# Altium PCB 控制板图.PcbDoc
Units mm, origin at the board's own origin, x right, y up, seen from the top; angles counter-clockwise.
Board outline 92.64 x 57.49 mm, 2 copper layers (Top Layer, Bottom Layer); 70 components, 69 nets, 280 pads, 119 vias.
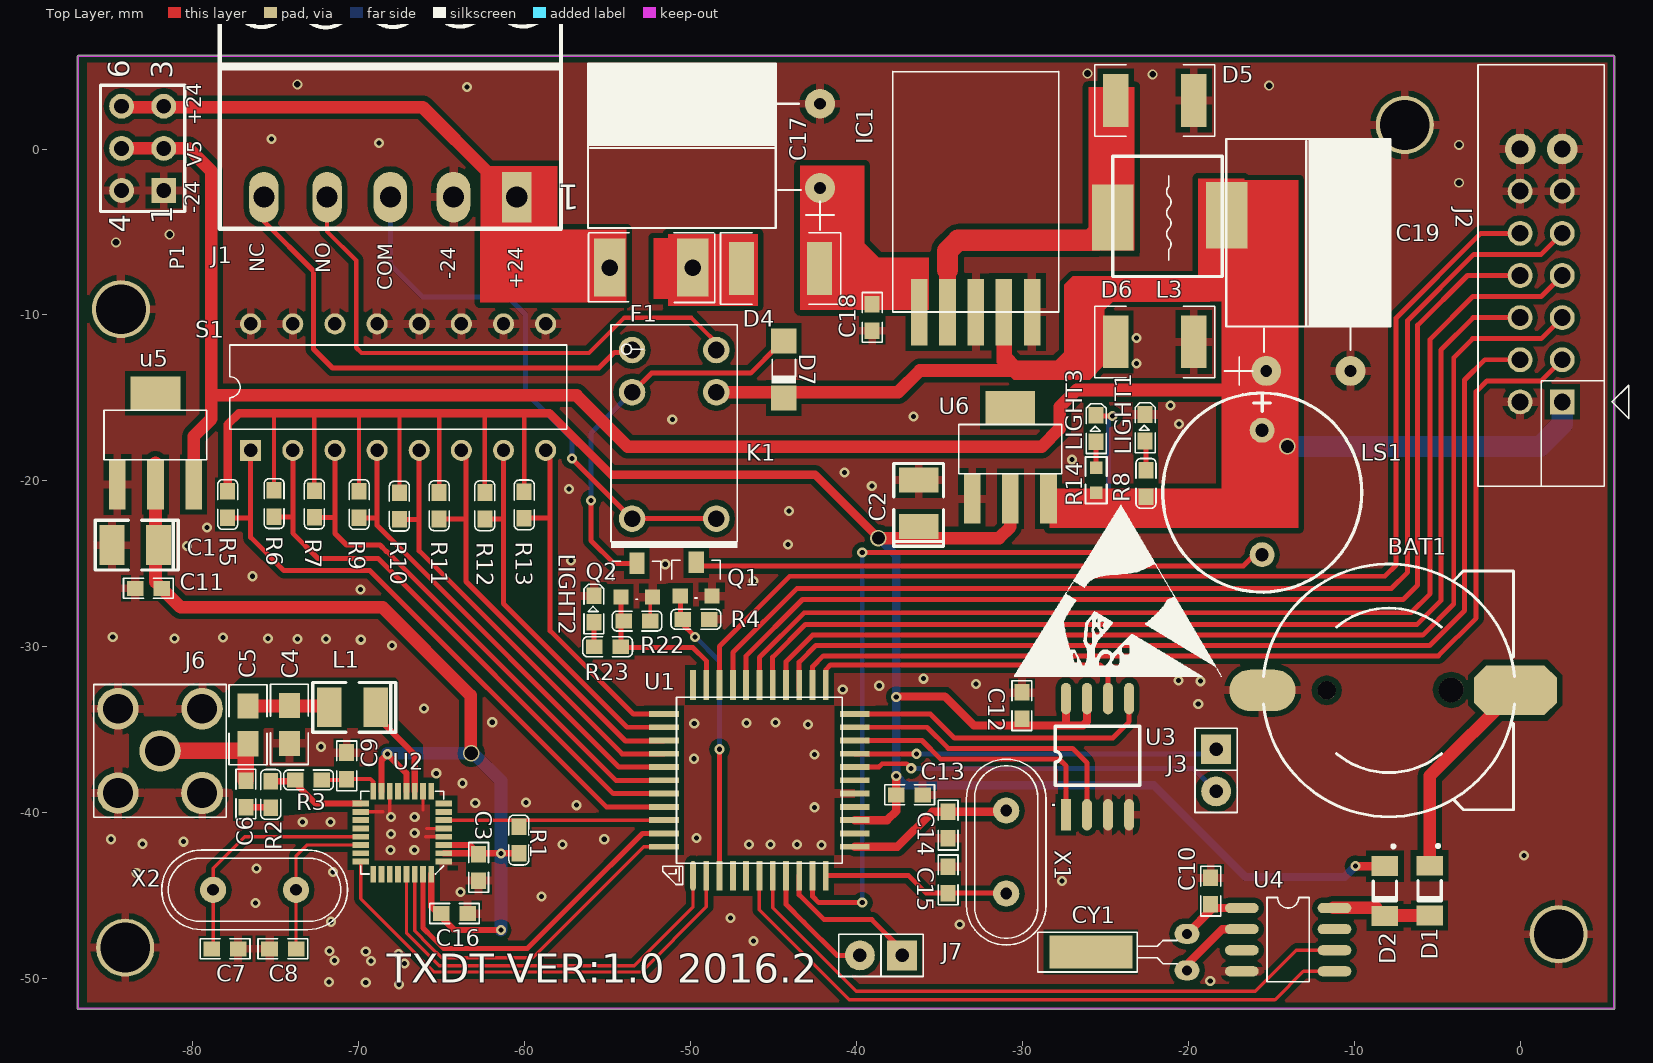
[diagram p0: Top Layer view]
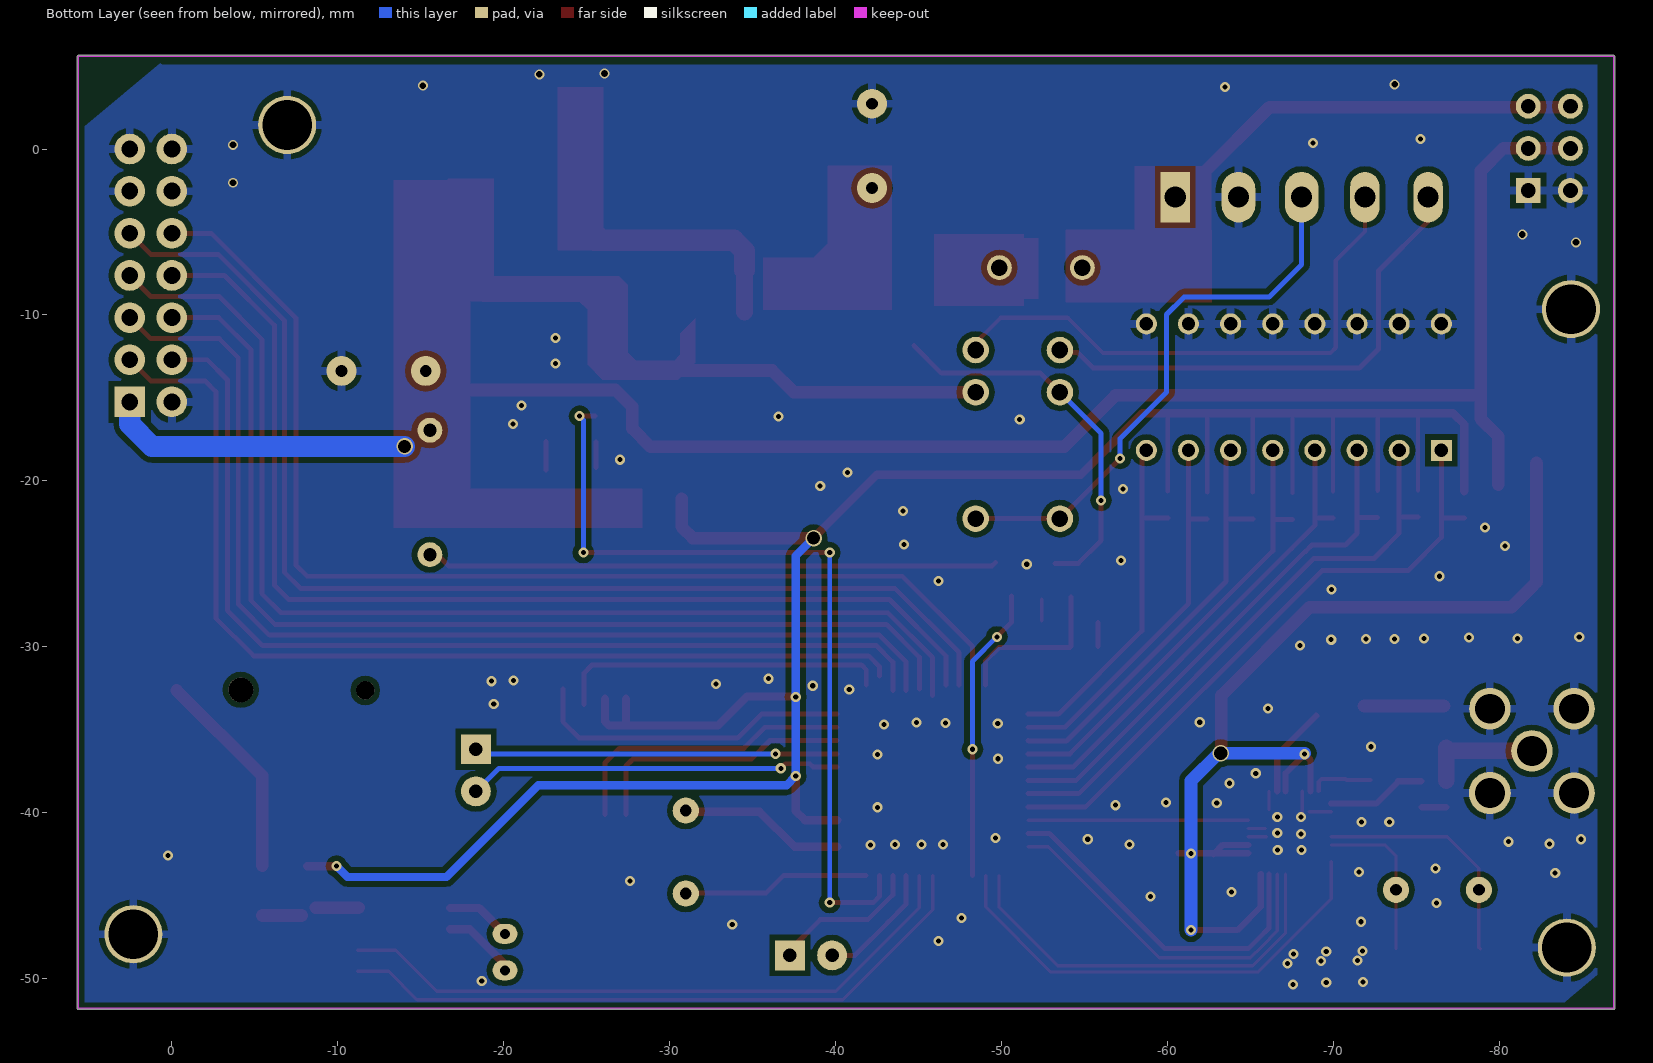
[diagram p1: Bottom Layer view, seen from below]

## Layer stack, top to bottom
Top Layer: signal copper 0.0356
Dielectric: dielectric 0.32, FR-4, Dk 4.8
Bottom Layer: signal copper 0.0356

## Board outline
-86.9,-51.85 cw(c-86.9,-51.8) -86.95,-51.8 -86.95,5.588 cw(c-86.9,5.588) -86.9,5.638 5.64,5.638 cw(c5.64,5.588) 5.69,5.588 5.69,-51.8 cw(c5.64,-51.8) 5.64,-51.85

## Design rules (kind name [scope] priority, off if disabled: settings)
Clearance [All] p1: gap=0.076
FabricationTestpoint [(IsPad And (OnTopLayer Or OnBottomLayer))] p1: side=3 testpointundercomponent=TRUE minsize=1.016 maxsize=2.54 preferedsize=1.524 minholesize=0 maxholesize=1.016 preferedholesize=0.813 testpointgrid=0.025 allowsidetop=TRUE allowsidebottom=TRUE usegrid=TRUE gridtolerance=0
PlaneConnect [All] p1: planeconnectstyle=Relief reliefexpansion=0.508 reliefentries=4 reliefconductorwidth=0.5 reliefairgap=0.254
PolygonConnect PolygonConnect_1 [isvia] p1: connectstyle=Direct reliefconductorwidth=0.254 reliefentries=4 polygonreliefangle="90 Angle"
PolygonConnect [All] p2: connectstyle=Relief reliefconductorwidth=0.5 reliefentries=4 polygonreliefangle="90 Angle"
RoutingVias [All] p1: holewidth=0.711 width=1.27 viastyle="Through Hole" minholewidth=0.711 minwidth=1.27 maxholewidth=0.711 maxwidth=1.27
SilkscreenOverComponentPads [All] p1: minsilkscreentomaskgap=0.254
SolderMaskExpansion [All] p1: expansion=0.102
Width [All] p1: maxlimit=2 minlimit=0.1 preferedwidth=0.254 minimp=50.000000 maximp=50.000000 favimp=50.000000
25 further rules are at their usual default settings.

## Components (designator, comment, footprint, x,y, rotation, side; value= is the part's Value field where it differs from the comment)
BAT1 "BATTERY" BAT600 -0.275,-32.625 r270 top
C1 "100uF" SMB -83.475,-23.875 r180 top
C2 "100uF" SMB -36.25,-21.35 r90 top
C3 "104" 0603_C -62.775,-42.5 r270 top
C4 "47P" 0805 -74.175,-35.825 r90 top
C5 "15P" 0805 -76.675,-35.85 r90 top
C6 "104" 0603_C -76.8,-39.675 r90 top
C7 "15P" 0603_C -78.855,-48.206 r0 top
C8 "15P" 0603_C -73.775,-48.206 r180 top
C9 "104" 0603_C -70.725,-37.975 r90 top
C10 "4.7P" 0603_C -18.65,-45.525 r90 top
C11 "104" 0603_C -81.875,-26.475 r180 top
C12 "104" 0603_C -30.025,-34.35 r90 top
C13 "104" 0603_C -37.6,-38.925 r0 top
C14 "18P" 0603_C -34.475,-39.95 r270 top
C15 "18P" 0603_C -34.475,-44.85 r90 top
C16 "104" 0603_C -65.025,-46.075 r0 top
C17 "470uF" CAP_RB.2/.52 -42.2,-2.35 r270 top
C18 "1uF" 0603_C -39.05,-9.35 r270 top
C19 "1000uF" CAP_RB.2/.52 -15.3,-13.375 r180 top
CY1 "32.768K" XTAL_26B -20.075,-49.5 r90 top
D1 "4148" D_1206 -5.45,-44.7 r270 top
D2 "4148" D_1206 -8.15,-44.725 r270 top
D4 "M7" D_1812 -46.925,-7.2 r0 top
D5 "SS14" D_1812 -19.675,2.925 r180 top
D6 "SMB/6.8CA" D_1812 -19.675,-11.625 r180 top
D7 "4148" DIODE_LL-34 -44.375,-11.575 r270 top
F1 "DX8A" 7035 -54.875,-7.15 r0 top
IC1 "XL2576S" TO263-5L -32.811,-9.827 r0 top
J1 "CON5" 3.81mm-5-Bend -60.475,-2.9 r180 top
J2 "CON14" PLUG_PARA14 2.54,-15.24 r90 top
J3 "CON2" sip2 -18.325,-36.175 r270 top
J6 "CON2" 5.08*5.08 -81.975,-36.275 r270 top
J7 "CON2" sip2 -37.25,-48.6 r180 top
K1 "RELAY-SPDT" RLY_HRS1H_S -53.525,-22.275 r270 top
L1 "2.2uH" SMB -70.375,-33.65 r180 top
L3 "100uH/3A" INDSMT5.18*5.49 -24.55,-4.125 r0 top
LIGHT1 "LED" 0603_L -22.6,-17.6 r90 top
LIGHT2 "LED" 0603_L -55.825,-28.525 r90 top
LIGHT3 "LED" 0603_L -25.55,-17.65 r90 top
LS1 "+5V" 12*9.5FMQ -15.55,-20.7 r270 top
P1 "Header 3X2A" HDR2X3_CEN -81.75,-2.5 r90 top
Q1 "2302" SOT-23 -50.617,-26.937 r0 top
Q2 "2302" SOT-23 -54.2,-27 r0 top
R1 "470K" 0603#1 -60.35,-40.85 r270 top
R2 "5.1K" 0603#1 -75.3,-38.1 r270 top
R3 "820" 0603#1 -72.225,-38.025 r180 top
R4 "1k" 0603#1 -50.479,-28.345 r0 top
R5 "820" 0603#1 -77.9,-20.625 r270 top
R6 "820" 0603#1 -75.1,-20.575 r270 top
R7 "820" 0603#1 -72.675,-20.6 r270 top
R8 "510" 0603#1 -22.55,-20.95 r90 top
R9 "820" 0603#1 -69.975,-20.625 r270 top
R10 "820" 0603#1 -67.55,-20.725 r270 top
R11 "820" 0603#1 -65.15,-20.7 r270 top
R12 "820" 0603#1 -62.4,-20.7 r270 top
R13 "820" 0603#1 -60.025,-20.65 r270 top
R14 "2k" 0603#2 -25.55,-20.725 r90 top
R22 "2k" 0603#1 -54.025,-28.45 r0 top
R23 "1k" 0603#1 -55.8,-30 r0 top
S1 "SW-DIP8" DIP16 -76.513,-18.159 r90 top
U1 "STC15F2K60S2-LQFP44" LQFP-44 -49.85,-43.8 r90 top
U2 "MF522" MF522 -64.875,-42.95 r180 top
U3 "SST25VF080b" SOP8-FAT -27.375,-39.625 r90 top
U4 "pcf8563T" SO-8 -16.775,-45.75 r0 top
u5 "AMS1117" SOT-223 -82.25,-19.725 r0 top
U6 "AMS1117" SOT-223 -30.725,-20.575 r0 top
X1 "11.0592M" XTAL_HC-49 -30.975,-44.875 r90 top
X2 "27.12M" XTAL_HC-49 -73.775,-44.65 r180 top
? "" 请勿触摸标志 -24.15,-27.625 r0 top

## Footprints (in the part's own frame and the unit in brackets; to place one, negate y for a bottom-side part, rotate by r counter-clockwise, add the part's x,y. Pads: shape width x height; smd on the part's side, far side on the other; paste and mask are expansions set on the pad)
3.81mm-5-Bend [mil]
  rect 70x120 hole 50: 1(0,0)
  oval 80x120 hole 50: 2(150,0) 3(300,0)
  oval 70x120 hole 50: 4(450,0) 5(600,0)
  silkscreen extent -105,-740 705,75
5.08*5.08 [mm]
  round 2.5 hole 1.8: 1(-2.54,2.54) 1(-2.54,-2.54) 1(2.54,-2.54) 2(0,0)
  round 2.54 hole 1.8: 1(2.54,2.54)
  silkscreen extent -4,-4 4,4
12*9.5FMQ [mm]
  round 1.5 hole 0.8: 1(-3.75,0) 2(3.75,0)
  silkscreen extent -5.99,-6 6.01,6, body extent -4.5,-4.51 4.52,4.51, height 5.01
0603#1 [mm]
  rect 1x0.9 smd: 1(0,0) 2(1.6,0)
  silkscreen extent -0.7,-0.6 2.3,0.6
0603#2 [mm]
  rect 0.762x0.762 smd: 1(0,0) 2(1.524,0)
  silkscreen extent -0.64,-0.64 2.16,0.64
0603_C [mm]
  rect 1x0.9 smd: 1(0,0) 2(1.6,0)
  silkscreen extent -0.7,-0.6 2.3,0.6
0603_L [mm]
  rect 1x0.9 smd: A(0,0) K(1.6,0)
  silkscreen extent -0.7,-0.6 2.3,0.6
0805 [mil]
  rect 60x50 smd: 1(0,0) 2(90,0)
  silkscreen extent -50,-45 140,45
7035 [mm]
  rect 1.905x3.5 smd: 1(0,0) 2(5,0)
  silkscreen extent -1.28,-2.1 6.32,2.1
BAT600 [mm]
  round 1.5 hole 1.5: 0(-0.026,-3.879)
  round 1.1 hole 1.1: 0(-0.001,-11.379)
  oct 3x5 smd: 1(-0.001,-0.009)
  oval 2.5x4 smd: 2(-0.001,-15.249)
  silkscreen extent -7.62,-15.2 7.62,-0.05
CAP_RB.2/.52 [mm]
  round 1.8 hole 0.711: 1(0,0) 2(-5.08,0)
  silkscreen extent -7.49,-13.97 2.54,0.86
D_1206 [mm]
  rect 1.2x1.6 smd: 1(-1.5,0) 2(1.5,0)
  silkscreen extent -2.76,-0.7 0.6,0.7, body extent -1.5,-0.75 1.5,0.75, height 1
D_1812 [mil]
  rect 60x125 smd: A(0,0) K(185,0)
  silkscreen extent -50,-85 235,85
DIODE_LL-34 [mil]
  rect 60x60 smd: A(0,0) K(135,0)
  silkscreen extent 43,-29 101,29
DIP16 [mil]
  rect 50x50 hole 32: 1(0,0)
  round 50 hole 32: 2(0,-100) 3(0,-200) 4(0,-300) 5(0,-400) 6(0,-500) 7(0,-600) 8(0,-700) 9(300,-700) 10(300,-600) 11(300,-500) 12(300,-400) 13(300,-300) 14(300,-200) 15(300,-100) 16(300,0)
  silkscreen extent 50,-750 250,50
HDR2X3_CEN [mm] "Connector; Header; 3x2 Position"
  rect 1.5x1.5 hole 0.9: 1(0,0)
  round 1.5 hole 0.9: 2(2.54,0) 3(5.08,0) 4(0,2.54) 5(2.54,2.54) 6(5.08,2.54)
  silkscreen extent -1.27,-1.27 6.35,3.81
INDSMT5.18*5.49 [mm] "Low Profile, High Current IHLP? Inductors"
  rect 2.5x4 smd: 1(0,0)
  rect 2.5x4 smd paste+0: 2(6.858,0.127)
  silkscreen extent 0,-3.56 6.6,3.68
LQFP-44 [mm]
  oval 1.8x0.35 smd: 1(0,0)
  rect 1.8x0.35 smd: 2(0,-0.8) 3(0,-1.6) 4(0,-2.4) 5(0,-3.2) 6(0,-4) 7(0,-4.8) 8(0,-5.6) 9(0,-6.4) 10(0,-7.2) 11(0,-8) 23(11.5,-8) 24(11.5,-7.2) 25(11.5,-6.4) 26(11.5,-5.6) 27(11.5,-4.8) 28(11.5,-4) 29(11.5,-3.2) 30(11.5,-2.4) 31(11.5,-1.6) 32(11.5,-0.8) 33(11.5,0)
  rect 0.35x1.8 smd: 12(1.75,-9.75) 13(2.55,-9.75) 14(3.35,-9.75) 15(4.15,-9.75) 16(4.95,-9.75) 17(5.75,-9.75) 18(6.55,-9.75) 19(7.35,-9.75) 20(8.15,-9.75) 21(8.95,-9.75) 22(9.75,-9.75) 34(9.75,1.75) 35(8.95,1.75) 36(8.15,1.75) 37(7.35,1.75) 38(6.55,1.75) 39(5.75,1.75) 40(4.95,1.75) 41(4.15,1.75) 42(3.35,1.75) 43(2.55,1.75) 44(1.75,1.75)
  silkscreen extent -0.53,-9 10.75,1.82
MF522 [mm]
  rect 1x0.35 smd: 1(0,0) 2(0,-0.5) 3(0,-1) 4(0,-1.5) 5(0,-2) 6(0,-2.5) 7(0,-3) 8(0,-3.5) 17(5,-3.5) 18(5,-3) 19(5,-2.5) 20(5,-2) 21(5,-1.5) 22(5,-1) 23(5,-0.5) 24(5,0)
  rect 0.35x1 smd: 9(0.75,-4.25) 10(1.25,-4.25) 11(1.75,-4.25) 12(2.25,-4.25) 13(2.75,-4.25) 14(3.25,-4.25) 15(3.75,-4.25) 16(4.25,-4.25) 25(4.25,0.75) 26(3.75,0.75) 27(3.25,0.75) 28(2.75,0.75) 29(2.25,0.75) 30(1.75,0.75) 31(1.25,0.75) 32(0.75,0.75)
  silkscreen extent 0,-4.25 5,0.75
PLUG_PARA14 [mm]
  rect 1.5x1.5 / inner rect 1.85x1.85 / far side rect 1.85x1.85 hole 1.016: 1(0,0)
  round 1.5 / inner round 1.85 / far side round 1.85 hole 1.016: 2(0,2.54) 3(2.54,0) 4(2.54,2.54) 5(5.08,0) 6(5.08,2.54) 7(7.62,0) 8(7.62,2.54) 9(10.16,0) 10(10.16,2.54) 11(12.7,0) 12(12.7,2.54)
  round 1.85 hole 1.016: 13(15.24,0) 14(15.24,2.54)
  silkscreen extent -5.08,-4 20.32,5.08
RLY_HRS1H_S [mm]
  round 1.6 hole 1: 1(0,5.08) 1(0,0) 2(-10.16,5.08) 3(-10.16,0) 4(-7.62,5.08) 5(-7.62,0)
  silkscreen extent -11.68,-1.27 1.78,6.35
sip2 [mm]
  rect 1.8x1.8 hole 0.813: 1(0,0)
  round 1.8 hole 0.813: 2(2.54,0)
  silkscreen extent -1.27,-1.27 3.81,1.27
SMB [mm]
  rect 1.5x2.4 smd: 1(-1.4,0) 2(1.4,0)
  silkscreen extent -2.6,-1.5 2.4,1.5, body extent -1.99,-1.4 1.95,1.4, height 2.51
SO-8 [mil]
  oval 80x24 smd: 1(0,0) 2(0,-50) 3(0,-100) 4(0,-150) 5(220,-150) 6(220,-100) 7(220,-50) 8(220,0)
  silkscreen extent 60,-175 160,25
SOP8-FAT [mm]
  rect 1.9x0.6 smd: 1(-0.5,0)
  oval 1.9x0.6 smd: 2(-0.5,-1.27) 3(-0.5,-2.54) 4(-0.5,-3.81) 5(6.5,-3.81) 6(6.5,-2.54) 7(6.5,-1.27) 8(6.5,0)
  silkscreen extent 1.27,-4.44 4.83,0.64, body extent -1.02,-4.57 7.11,0.64, height 1.5
SOT-23 [mil]
  rect 36x36 smd: 1(0,0) 2(75,0)
  rect 36x50 smd: 3(38,80)
  silkscreen extent -20,-5 95,85, body extent -18,0 92,81, height 39
SOT-223 [mm]
  rect 1x3 smd: 1(-2.3,-0.5) 2(0,-0.5) 3(2.3,-0.5)
  rect 3x2 smd: ""(0,5)
  silkscreen extent -3.1,1 3.1,3.98
TO263-5L [mm]
  rect 1x4 smd: 1(-3.4,0) 2(-1.7,0) 3(0,0) 4(1.7,0) 5(3.4,0)
  silkscreen extent -5,0 5,14.5
XTAL_26B [mm]
  oval 1.2x1.5 hole 0.6: 1(0,0) 2(2.2,0)
  rect 2x5 smd: 3(1.1,5.8)
  silkscreen extent -0.1,0.6 2.3,9
XTAL_HC-49 [mil]
  round 62 hole 28: 1(0,0) 2(196.85,0)
  silkscreen extent -122,-94 319,94
请勿触摸标志 [mm]
  silkscreen extent -6.35,-4.14 6.17,6.17

## Part data
BAT1: "Battery"
C1 C2: library part "CAPACITOR POL", "Capacitor"
C3 C4 C5 C6 C7 C8 C9 C11 C12 C13 C14 C15 C16 C18: library part CAP, "Capacitor"
C10: library part "Cap Semi", "Capacitor (Semiconductor SIM Model)"
C17 C19: library part ELECTRO1, "Electrolytic Capacitor"
CY1: library part JZ, "Electrolytic Capacitor"
D1 D2: library part "Diode 1N4148", "High Conductance Fast Diode"
D4 D6 D7: library part DIODE, "Diode"
D5: library part "DIODE SCHOTTKY", "Schottky Diode"
F1: library part FUSE1, "Fuse"
J1 J2 J3 J6 J7: "Connector"
L1 L3: library part INDUCTOR1
LIGHT1 LIGHT2 LIGHT3: "DIODE_LED_A/B,C"
LS1: library part Buzzer, "Buzzer"
P1: "Header, 3-Pin, Dual row"
Q1 Q2: library part NPN, "NPN Bipolar Transistor"
R1 R2 R3 R5 R6 R7 R9 R10 R11 R12 R13: library part RES2
R4 R14 R22 R23: library part Res2, "Resistor"
R8: library part RES5
U2: library part MF522B
U3: library part SST25VF020
U4: library part HYM8563
u5 U6: library part VOLTREG
X1 X2: library part Tm08B.S01_12M_42

## Free pads (board coordinates)
  round 1.5 hole 1: 0(-54.875,-7.15) 0(-49.875,-7.15)
  round 3.5 hole 3: 2(-84.328,-9.652) 2(-84.074,-48.133) 5(-6.95,1.45) 6(2.325,-47.325)

## Via types
v1: diameter 0.61, hole 0.305, Top Layer to Bottom Layer, tented both sides, 108 vias
v2: diameter 0.6, hole 0.4, Top Layer to Bottom Layer, tented both sides, 8 vias
v3: diameter 1, hole 0.8, Top Layer to Bottom Layer, tented both sides, 3 vias

## Nets (pads, with @x,y where several pads share a name; then routed paths per layer and width w, separated by ;. In a path a pad name is that pad's centre, name@x,y a point inside that pad or via, vN(x,y) a via of type N, cw(c..) or ccw(c..) an arc to the next point about the centre after c; other vN are vias at no path point)
3V_522: C1.1 C3.1 C11.1 C16.1 R1.2 U2.2 U2.3 U2.12 U2.15 U2.32 u5.2 | length 68.1
  Top Layer w0.381: U2.15 -68.625,-36.825 v1(-68.275,-36.475) -67.125,-37.625 U2.12 ; U2.32 -65.625,-45.675 -64.225,-47.075 v1(-61.425,-47.075) ; U2.2 C3.1@-62.825,-42.45 ; U2.3 -63.325,-41.95 C3.1@-62.825,-42.45 ; C3.1 C3.1@-62.825,-42.45 ; C3.1@-62.775,-42.45 v1(-61.425,-42.45) R1.2@-60.675,-42.45
  Top Layer w0.762: u5.2@-82.25,-18.925 -82.25,-26.1 C11.1 -80.725,-27.625 -68.55,-27.625 -63.25,-32.925 -63.25,-35.777 ; v3@-63.25,-36.475 -63.25,-35.777 ; -63.25,-35.025 -63.25,-35.777
  Bottom Layer w0.762: v1@-68.275,-36.425 -63.075,-36.425 -61.425,-38.075 v1(-61.425,-42.45) v1(-61.425,-47.075)
  other v3: -63.225,-36.425
CTRL: LIGHT3.K U1.10 | length 52.2
  Top Layer w0.3: U1.10 -42.65,-45.043 -42.268,-45.425 v1(-39.65,-45.425) ; v1(-39.65,-24.325) -27.101,-24.325 ; -26.925,-24.325 -27.101,-24.325 ; LIGHT3.K@-25.5,-16.1 v1(-24.575,-16.1) ; v1(-24.8,-24.325) -27.101,-24.325
  Bottom Layer w0.3: v1(-39.65,-45.425) -39.65,-32.927 ; -39.65,-31.875 -39.65,-32.927 ; -39.65,-25.1 -39.65,-26.451 ; v1(-39.65,-24.325) -39.65,-26.451 ; v1(-24.8,-24.325) -24.8,-16.325 v1(-24.575,-16.1) ; -39.65,-32.927 -39.65,-26.451
FMQ: Q1.1 R4.1 U1.3 | length 17.8
  Top Layer w0.3: Q1.1 -50.617,-28.207 -50.617,-28.508 v1(-49.725,-29.4) ; U1.3 v1(-48.25,-36.175)
  Bottom Layer w0.3: v1(-49.725,-29.4) -48.25,-30.875 v1(-48.25,-36.175)
GND: BAT1.2 C1.2 C2.2 C3.2 C4.1 C7.2 C8.2 C9.2 C10.2 C11.2 C12.2 C13.2 C14.2 C15.2 C16.2 C17.2 C18.2 C19.2 D5.A D6.A IC1.3 IC1.5 J1.2 J2.2 J2.11 J2.12 J2.13 J2.14 J6.1 LIGHT1.K LIGHT2.K P1.1 P1.4 pad.2 pad.5 pad.6 Q1.2 Q2.2 R4.2 R22.2 S1.9 S1.10 S1.11 S1.12 S1.13 S1.14 S1.15 S1.16 U1.16 U2.1 U2.4 U2.5 U2.10 U2.14 U2.18 U3.3 U3.4 U4.4 u5.1 U6.1 | length 7.3
  Top Layer w0.2: U2.18 -68.55,-39.95 ; v1@-68.125,-40.175 U2.14 ; -66.125,-39.825 U2.10 ; -65.95,-41.45 U2.4 ; -65.9,-40.95 U2.5 ; R22.2 Q2.2@-52.425,-27.13
  other v1: -67.575,-50.35 -69.575,-50.225 -71.8,-50.2 -18.675,-50.15 -67.25,-49.1 -69.25,-48.95 -71.45,-48.9 -67.6,-48.525 -69.575,-48.375 -71.75,-48.325 -46.2,-47.725 -33.775,-46.75 -71.675,-46.575 -47.6,-46.35 -76.225,-45.45 -58.975,-45.05 -63.875,-44.775 -27.6,-44.125 -83.375,-43.625 -71.55,-43.575 -76.15,-43.375 0.225,-42.575 -68.075,-42.25 -66.65,-42.25 -42.1,-41.95 -57.725,-41.925 -46.475,-41.925 -45.175,-41.925 -43.575,-41.925 -83.025,-41.875 -80.55,-41.75 -84.925,-41.6 -55.2,-41.6 -49.65,-41.525 -68.05,-41.275 -66.625,-41.225 -73.375,-40.55 -71.7,-40.55 -68.05,-40.25 -66.625,-40.25 -42.525,-39.675 -56.875,-39.55 -62.975,-39.425 -59.925,-39.375 -63.75,-38.225 -65.325,-37.625 -49.8,-36.75 -42.525,-36.5 -72.275,-36.025 -42.925,-34.675 -49.775,-34.625 -46.625,-34.6 -44.875,-34.575 -61.95,-34.55 -66.075,-33.725 -19.4,-33.45 -40.825,-32.575 -38.625,-32.35 -32.8,-32.25 -19.275,-32.075 -20.6,-32.025 -35.95,-31.925 -68,-29.925 -69.875,-29.575 -73.7,-29.525 -71.975,-29.525 -81.1,-29.5 -75.475,-29.5 -78.175,-29.45 -84.825,-29.4 -69.9,-26.55 -46.2,-26.025 -76.4,-25.75 -51.525,-25.025 -57.2,-24.8 -80.35,-23.925 -44.125,-23.825 -79.15,-22.8 -44.075,-21.825 -57.325,-20.5 -39.075,-20.3 -40.725,-19.5 -27,-18.725 -20.55,-16.575 -51.1,-16.3 -36.55,-16.125 -21.075,-15.45 -23.125,-12.925 -23.125,-11.4 -68.775,0.375 -75.25,0.6 -63.475,3.75
  other v2: -84.625,-5.625 -81.4,-5.15 -3.683,-2.032 -3.683,0.254 -15.125,3.825 -73.7,3.9 -22.15,4.5 -26.075,4.55
GOIN: Q2.1 R22.1 R23.2 U1.32 | length 9.8
  Top Layer w0.3: R23.2@-54.2,-29.975 Q2.1 ; R23.2@-54.125,-30.05 -49.85,-30.05 -49.05,-30.85 U1.32
IENABLE_G: J2.4 U1.25 | length 60.8
  Top Layer w0.3: U1.25@-43.45,-32.625 U1.25 -43.45,-30.925 -42.45,-29.925 -5.45,-29.925 -3.35,-27.825 -3.35,-13.925 -2.125,-12.7 J2.4
IENABLE_RCK: J2.5 U1.26 | length 65.8
  Top Layer w0.3: U1.26@-44.25,-32.625 U1.26 -44.25,-30.9 -42.65,-29.3 -9.1,-29.3 -5.875,-29.3 -4,-27.425 -4,-12.575 -2.855,-11.43 1.27,-11.43 J2.5
IENABLE_SCK: J2.6 U1.27 | length 64.3
  Top Layer w0.3: U1.27@-45.05,-32.55 U1.27 -45.05,-30.625 -43.075,-28.65 -10.025,-28.65 -6.2,-28.65 -4.775,-27.225 -4.775,-12.11 -2.825,-10.16 J2.6
IENABLE_SI: J2.3 U1.24 | length 61.4
  Top Layer w0.3: U1.24@-42.65,-31.75 -42.65,-31.2 -42,-30.55 -4.925,-30.55 -2.65,-28.275 -2.65,-14.62 -2,-13.97 1.27,-13.97 J2.3
IN: F1.1 J1.1 P1.3 P1.6 pad.0@-54.875,-7.15 | length 24.5
  Top Layer w0.762: P1.6@-84.09,2.58 -84.028,2.518 -72.679,2.518 ; -71.832,2.518 -72.679,2.518 ; -62.125,-1.5 -66.143,2.518 -72.679,2.518
IPRESS_G: J2.8 U1.29 | length 67.1
  Top Layer w0.3: U1.29 -46.65,-30.55 -43.25,-27.15 -7.05,-27.15 -6.175,-26.275 -6.175,-10.62 -3.175,-7.62 J2.8
IPRESS_RCK: J2.9 U1.30 | length 71.3
  Top Layer w0.3: U1.30 -47.45,-30.35 -43.575,-26.475 -7.75,-26.475 -6.775,-25.5 -6.775,-10.331 -2.794,-6.35 1.27,-6.35 J2.9
IPRESS_SCK: J2.10 U1.31 | length 70.1
  Top Layer w0.3: U1.31@-48.25,-32.75 U1.31 -48.25,-29.975 -44.025,-25.75 -8.15,-25.75 -7.475,-25.075 -7.475,-10.182 -2.373,-5.08 J2.10
IPRESS_SI: J2.7 U1.28 | length 69.2
  Top Layer w0.3: U1.28@-45.85,-32.95 U1.28 -45.85,-30.65 -43.15,-27.95 -6.575,-27.95 -5.425,-26.8 -5.425,-11.465 -2.85,-8.89 1.27,-8.89 J2.7
K1: R5.2 S1.1 U1.41 | length 38.2
  Top Layer w0.3: R5.2 -76.588,-22.225 ; S1.1 -76.513,-23.4 -74.513,-25.4 -69.325,-25.4 -55.075,-39.65 U1.41
K2: R6.2 S1.2 U1.40 | length 35
  Top Layer w0.3: R6.2 -73.998,-22.175 ; S1.2 -73.973,-23.152 -72.45,-24.675 -68.825,-24.675 -54.65,-38.85 U1.40
K3: R7.2 S1.3 U1.39 | length 32.1
  Top Layer w0.3: R7.2 -71.558,-22.2 ; S1.3 -71.433,-23.175 -70.738,-23.87 -68.72,-23.87 -68.342,-24.249 -68.301,-24.249 -54.5,-38.05 U1.39
K4: R9.2 S1.4 U1.38 | length 30.5
  Top Layer w0.3: R9.2 -68.918,-22.225 ; S1.4 -68.893,-22.682 -67.505,-24.07 ; -68.618,-22.957 -67.505,-24.07 ; U1.38 -54.325,-37.25 -67.505,-24.07
K5: R10.2 S1.5 U1.37 | length 27.1
  Top Layer w0.3: R10.2 -66.353,-22.325 ; S1.5 -66.353,-24.222 -54.125,-36.45 U1.37
K6: R11.2 S1.6 U1.36 | length 26.2
  Top Layer w0.3: R11.2@-65.033,-22.3 R11.2 -63.562,-22.3 -63.538,-22.276 ; -63.538,-19.801 -63.538,-20.751 ; S1.6@-63.538,-18.434 -63.538,-20.751 ; U1.36 -51.625,-35.675 -53.925,-35.675 -63.538,-26.062 -63.538,-22.276 ; -63.538,-22.276 -63.538,-20.751
K7: R12.2 S1.7 U1.35 | length 23.3
  Top Layer w0.3: R12.2 -61.373,-22.3 ; -61.273,-21.798 -61.273,-21.576 ; S1.7 -61.273,-21.576 ; U1.35 -53.825,-34.85 -61.273,-27.402 -61.273,-21.576
K8: R13.2 S1.8 U1.34 | length 22.9
  Top Layer w0.3: R13.2 -59.553,-22.25 ; -58.733,-22.25 -59.553,-22.25 ; S1.8 -58.458,-18.434 -58.458,-22.275 ; -58.458,-24.917 -58.458,-24.301 ; U1.34 -53.45,-34.05 -58.458,-29.042 -58.458,-24.301 ; -59.553,-22.25 -58.483,-22.25 -58.458,-22.275 ; -58.458,-24.301 -58.458,-22.275
K9: J7.1 U1.9 | length 9.1
  Top Layer w0.3: U1.9 -43.45,-44.95 -41.95,-46.45 -39.075,-46.45 -37.25,-48.275 J7.1
K10: J7.2 U1.8 | length 7.5
  Top Layer w0.3: U1.8 -44.25,-45.525 -43.175,-46.6 -41.175,-48.6 J7.2
NetBAT1_1: BAT1.1 D1.1 | length 12.7
  Top Layer w0.762: D1.1 -5.45,-37.79 BAT1.1
NetC4_2: C4.2 C5.2 L1.2 | length 4.8
  Top Layer w0.8: C5.2 L1.2@-71.861,-33.564
NetC5_1: C5.1 C6.2 J6.2 | length 7
  Top Layer w1: J6.2 C5.1@-77,-36.275 ; C6.2 C5.1@-76.8,-36.075
NetC6_1: C6.1 R2.2 | length 1.5
  Top Layer w0.381: C6.1 R2.2@-75.325,-39.675
NetC7_1: C7.1 U2.21 X2.2 | length 14.6
  Top Layer w0.2: C7.1 -78.775,-48.126 X2.2 -78.775,-44.4 -78.775,-43.35 -76.875,-41.45 U2.21
NetC8_1: C8.1 U2.22 X2.1 | length 10
  Top Layer w0.2: C8.1 X2.1 ; X2.1@-73.775,-44.4 X2.1 ; U2.22 -73.125,-41.95 -73.775,-42.6 X2.1
NetC9_1: C9.1 R3.1 U2.16 | length 3.7
  Top Layer w0.254: R3.1 C9.1@-70.775,-38.025 ; C9.1 -69.3,-37.975 -69.125,-38.15 U2.16
NetC10_1: C10.1 CY1.2 U4.1 | length 3.9
  Top Layer w0.5: CY1.2 -18.525,-45.75 U4.1
NetCY1_1: CY1.1 U4.2 | length 4.5
  Top Layer w0.5: CY1.1 -20.075,-49.15 -17.945,-47.02 U4.2
NetD1_2: D1.2 D2.2 U4.8 | length 5
  Top Layer w0.762: U4.8@-11.262,-45.725 D2.2@-8.675,-45.725 ; D2.2@-7.825,-46.2 D1.2
NetD4_A: D4.A F1.2 pad.0@-49.875,-7.15
NetD5_K: D5.K IC1.2 L3.1 | length 13.1
  Top Layer w1: IC1.2 -34.511,-7.3
  Top Layer w1.27: -34.511,-7.3 -34.511,-6.136 -33.875,-5.5 L3.1@-25.4,-5.5
NetD7_A: D7.A K1.5 Q2.3 | length 23.3
  Top Layer w0.3: v1(-56,-21.175) -56,-23.6 -54.632,-24.968 Q2.3 ; K1.5@-53.515,-14.665 -52.355,-13.505 -46.38,-13.505 D7.A@-44.725,-11.85
  Bottom Layer w0.3: v1(-56,-21.175) -56,-17.13 K1.5
NetL1_1: L1.1 U2.11 | length 5.5
  Top Layer w0.381: L1.1@-68.975,-34.15 -66.625,-36.5 U2.11
NetLIGHT1_A: LIGHT1.A R8.2 | length 1.7
  Top Layer w0.3: R8.2 LIGHT1.A@-22.55,-17.625
NetLIGHT2_A: LIGHT2.A R23.1 | length 1.5
  Top Layer w0.3: R23.1@-55.825,-29.975 LIGHT2.A
NetLIGHT3_A: LIGHT3.A R14.2 | length 1.6
  Top Layer w0.3: R14.2 LIGHT3.A
NetLS1_2: LS1.2 Q1.3 | length 34.7
  Top Layer w0.3: Q1.3 -49.432,-25.125 -16.675,-25.125 LS1.2@-15.5,-23.95
NetR2_1: R2.1 R3.2 U2.17 | length 5.9
  Top Layer w0.381: R2.1 R3.2@-73.9,-38.1 ; R3.2@-73.825,-38.225 -72.6,-39.45 U2.17
OSCI: C14.1 U1.12 X1.2 | length 9.9
  Top Layer w0.5: U1.12 -37.525,-42.05 -35.425,-39.95 C14.1 X1.2@-31.05,-39.95
OSCO: C15.1 U1.11 X1.1 | length 11.3
  Top Layer w0.3: U1.11 -36.85,-43.8 -35.8,-44.85 C15.1 X1.1@-31,-44.85
OUT: U1.33
PCFSCL: U1.7 U4.6 | length 38.9
  Top Layer w0.2: U1.7 -45.05,-45.725 -40.014,-50.761 -15.961,-50.761 -13.49,-48.29 U4.6
PCFSDA: U1.6 U4.5 | length 39.7
  Top Layer w0.2: U1.6 -45.85,-45.85 -40.431,-51.269 -14.769,-51.269 -13.06,-49.56 U4.5
RCMISO: U1.43 U2.31 | length 24.3
  Top Layer w0.3: -66.125,-44.37 -66.125,-46.95 ; U2.31 -66.125,-46.95 ; -65.325,-47.75 -65.5,-47.575 ; -57.025,-45.375 -56.813,-45.163 ; U1.43 -52.9,-41.25 -56.813,-45.163 ; -66.125,-46.95 -65.5,-47.575 ; -65.5,-47.575 -64.9,-48.175 -59.825,-48.175 -56.813,-45.163
RCMOSI: U1.44 U2.30 | length 22.4
  Top Layer w0.2: U2.30 -66.625,-47.125 -65.713,-48.037 ; -65.375,-48.375 -65.713,-48.037 ; U1.44 -52.825,-42.05 -59.525,-48.75 -65,-48.75 -65.713,-48.037
RCRST: R1.1 U1.42 U2.6 | length 17.4
  Top Layer w0.2: U2.6 -59.028,-40.45 ; -58.775,-40.45 -59.028,-40.45 ; -55.725,-40.45 U1.42 ; U1.42@-51.85,-40.45 -59.028,-40.45
RCSCK: U1.1 U2.29 | length 26
  Top Layer w0.2: U2.29 -67.125,-47.25 -65.475,-48.9 ; -65.3,-49.075 -65.475,-48.9 ; -50.875,-46.7 -50.35,-46.175 ; U1.1 -49.85,-45.675 -50.35,-46.175 ; -65.475,-48.9 -65.15,-49.225 -53.4,-49.225 -50.35,-46.175
RCSDA: U1.2 U2.24 | length 28.4
  Top Layer w0.2: U2.24 -69.875,-45.175 -65.447,-49.603 -52.978,-49.603 -49.05,-45.675 U1.2
RLYC: J1.4 K1.2 | length 34
  Top Layer w0.254: J1.4 -71.905,-4.97 -70.15,-6.725 -70.15,-11.978 -69.828,-12.3 -56.125,-12.3 -54,-10.175 -49.935,-10.175 K1.2@-47.845,-12.265
RLYCOM: J1.3 K1.1 | length 33.1
  Top Layer w0.3: v1(-57.15,-18.65) -53.525,-22.275 K1.1@-48.795,-22.275
  Bottom Layer w0.3: J1.3 -68.095,-6.955 -66.125,-8.925 -61,-8.925 -59.95,-9.975 -59.95,-14.65 -57.15,-17.45 v1(-57.15,-18.65)
RLYO: J1.5 K1.3 | length 31.1
  Top Layer w0.3: J1.5 -75.715,-4.36 -72.725,-7.35 -72.725,-12.05 -71.575,-13.2 -55.525,-13.2 -54.59,-12.265 K1.3@-52.925,-12.265
RX1: J3.2 U1.18 | length 22.5
  Top Layer w0.3: U1.18 -38.65,-37.25 -38.45,-37.05 -36.975,-37.05 v1(-36.7,-37.325)
  Bottom Layer w0.3: v1(-36.7,-37.325) -19.715,-37.325 J3.2
RX2: U1.4
SSTFLS: U1.20 U3.1 | length 16.2
  Top Layer w0.3: U1.20 -36.05,-35.65 -34.95,-36.75 -27.8,-36.75 ; -27.7,-36.85 -27.375,-37.175 U3.1
SSTSCLK: U1.23 U3.6 | length 21.2
  Top Layer w0.3: U1.23 -41.85,-31.375 -41.575,-31.1 -25.325,-31.1 -24.835,-31.59 U3.6 ; U3.6@-24.83,-33.476 -24.83,-32.556 -24.83,-32.056
SSTSIMO: U1.22 U3.5 | length 20
  Top Layer w0.3: U1.22 -35.55,-34.05 -34.1,-35.5 -30.251,-35.5 ; -30.725,-35.5 -30.251,-35.5 ; U3.5 -23.565,-34.515 -24.55,-35.5 -30.251,-35.5 ; U3.5@-23.56,-33.125 -23.56,-32.875 U3.5@-23.56,-32.556
SSTSOMI: U1.21 U3.2 | length 18
  Top Layer w0.3: U1.21 -35.75,-34.85 -34.475,-36.125 -26.975,-36.125 -26.105,-36.995 U3.2
TTL1: U1.13
TTL2: U1.17
TX1: J3.1 U1.19 | length 21.5
  Top Layer w0.3: U1.19 v1(-36.375,-36.45)
  Bottom Layer w0.3: v1(-36.375,-36.45) J3.1@-18.6,-36.45
TX2: U1.5
V3: C2.1 C12.1 C13.1 D2.1 R5.1 R6.1 R7.1 R9.1 R10.1 R11.1 R12.1 R13.1 U1.14 U3.7 U3.8 U6.2 | length 157
  Top Layer w0.254: R6.1 -75.1,-15.975 ; R7.1 -72.675,-15.975 ; R9.1 -69.975,-15.975 ; R10.1 -67.55,-19.626 ; -67.55,-19.112 -67.55,-19.626 ; -67.55,-15.95 -67.55,-19.626 ; R11.1 -65.15,-15.95 ; R12.1 -62.4,-16.025 ; R13.1 -60.025,-15.975
  Top Layer w0.5: R5.1 -77.9,-16.6 -77.225,-15.925 -58.5,-15.925 -54.8,-19.625 -42.5,-19.625 v3(-38.675,-23.45) ; U1.14 -38.15,-40.45 -37.6,-39.9 C13.1 v1(-37.6,-37.8) ; v1@-37.6,-33 -34.675,-33 -32.925,-34.75 -26.35,-34.75 -26.105,-34.505 U3.7 ; -27.375,-34.675 U3.8 ; v1(-9.925,-43.225) D2.1
  Top Layer w0.762: v3(-38.675,-23.45) -31.4,-23.45 -30.725,-22.775 U6.2
  Bottom Layer w0.5: v3(-38.675,-23.45) -37.6,-24.525 v1(-37.6,-33.025) v1(-37.6,-37.8) -37.05,-38.35 -22.075,-38.35 -16.55,-43.875 -10.575,-43.875 v1(-9.925,-43.225)
V5: C19.1 D6.K D7.K IC1.4 J2.1 K1.4 L3.2 LS1.1 P1.2 P1.5 R8.1 R14.1 u5.3 U6.3 | length 129.4
  Top Layer w0.762: P1.5@-84.09,0.04 -81.55,0.04 -80.24,0.04 -78.888,-1.312 -78.888,-14.251 -78.888,-16.262 -79.95,-17.325 u5.3 ; -78.838,-14.85 -56.875,-14.85 -53.775,-17.95 -28.85,-17.95 -27.75,-16.85 -27.75,-15.55 -26.725,-14.525 -15.675,-14.525 ; K1.4 -37.48,-14.655 -36.175,-13.35 -29.775,-13.35
  Bottom Layer w0.635: J2.1@2.54,-15.485 J2.1
  Bottom Layer w1.27: v3(-14.025,-17.925) 1.2,-17.925 2.54,-16.585 J2.1@2.54,-15.485
VIN24: C17.1 C18.1 D4.K IC1.1
pads on no net: BAT1.0 CY1.3 U1.15 U2.7 U2.8 U2.9 U2.13 U2.19 U2.20 U2.23 U2.25 U2.26 U2.27 U2.28 U4.3 U4.7 u5. U6.

## Polygon pours and split planes (outlines as drawn)
GND on Bottom Layer "Top Layer-No Net" (solid, remove dead copper, pour order 1001): -85.9,5.083 -85.9,-47.757 -85.9,-49.778 -84.254,-51.157 -83.485,-51.8 5.64,-51.8 5.64,1.04 0.701,5.175 0.591,5.083 -85.9,5.083
GND on Top Layer "Top Layer-No Net" (solid, remove dead copper, pour order 1000): -86.36,5.588 -86.36,-58.125 -86.135,-58.35 -85.225,-58.35 -81.825,-58.35 -81.6,-58.125 5.64,-58.125 5.64,5.588 -86.36,5.588

## Keep-outs
Keep-Out Layer:
  lines w0.1: 114.464,-108.966 115.48,-107.95 ; -86.9,-51.8 -86.9,5.588 5.64,5.588 5.64,-51.8 -86.9,-51.8

## Other copper
Top Layer:
  rectangle net NetD4_A: -51.35,-9.45 -45.925,-5.125
  rectangle net IN: -62.7,-9.25 -53.85,-4.85
  rectangle net NetD5_K: -26.025,-6.125 -23.25,3.75
  rectangle net V5: -18,-22.375 -13.35,-1.875
  region net NetD5_K: -24.818,-3.518 -26.55,-5.25 -26.002,-5.798 -24.27,-4.066
  rectangle net V5: -19.425,-9.2 -16.625,-1.775
  rectangle net NetD4_A: -52.225,-9.05 -49.075,-5.375
  region net IN: -58.025,-9.25 -58.025,-1.025 -62.65,-1.025 -62.65,-9.25
  rectangle net VIN24: -43.4,-7.375 -39.525,-1
  rectangle net VIN24: -43.4,-9.7 -35.625,-6.55
  region net VIN24: -38.227,-6.977 -39.959,-5.245 -40.507,-5.793 -38.775,-7.525
  rectangle net V5: -28.375,-22.85 -13.35,-20.475
  pour cut-out: -65.425,-40.75 -65.425,-41.675 -65.45,-41.7 -64.125,-41.7 -64.125,-40.75 -64.15,-40.725 -64.175,-40.75
  pour cut-out: -83.85,-34.2 -83.85,-38.325 -83.6,-38.575 -83.575,-38.55 -77.725,-38.55 -77.55,-38.725 -77.55,-40.425 -77.525,-40.45 -71.05,-39.875 -70.675,-39.725 -69.875,-39.45 -68.875,-39.475 -68.875,-37.35 -69.025,-37.2 -75.575,-37.2 -75.875,-36.9 -75.875,-35.15 -75.65,-34.925 -68.925,-34.925 -67.25,-36.6 -67.25,-39.425 -66.1,-39.425 -66.1,-35.9 -67.575,-34.425 -67.575,-32.05 -67.8,-31.825 -77.15,-31.825 -79.425,-34.1 -79.425,-34.2
  region net V5: -31.541,-10.208 -31.541,-12.875 -30.525,-13.891 -25.953,-13.891 -25.064,-13.002 -25.064,-9.7 -24.556,-9.192 -18.714,-9.192 -18.714,-7.668 -26.969,-7.668 -27.477,-8.176 -27.477,-12.24 -27.985,-12.748 -30.271,-12.748 -30.652,-12.367 -30.652,-11.097

## Silkscreen, mask and mechanical layers (free items; w line width, h text height)
Top Overlay:
  text "+24" at -79.175,1.443 h1.52 r90
  text "V5" at -79.15,-1.075 h1.52 r90
  text "-24" at -79.275,-3.875 h1.52 r90
  text "NC" at -75.4,-7.425 h1.52 r90
  text "NO" at -71.425,-7.5 h1.52 r90
  text "-24" at -63.875,-7.85 h1.52 r90
  text "+24" at -59.8,-8.45 h1.52 r90
  text "COM" at -67.675,-8.525 h1.52 r90
  text "TXDT VER:1.0 2016.2" at -68.325,-50.825 h3

## Text inside footprints (layer, text, board x,y; h text height)
J1: Top Overlay "1" at -56.665,-2.138 h1.52 r180
P1: Top Overlay "4" at -83.782,-5.04 h1.27 r90; Top Overlay "1" at -81.242,-4.532 h1.27 r90; Top Overlay "3" at -81.25,4.25 h1.27 r90; Top Overlay "6" at -83.825,4.275 h1.27 r90